# Altium PCB CANHub2Reihig.PcbDoc
Units mil, origin at the board's own origin, x right, y up, seen from the top; angles counter-clockwise.
Board outline 2100 x 915 mil, 2 copper layers (Top Layer, Bottom Layer); 16 components, 4 nets, 66 pads, 0 vias.
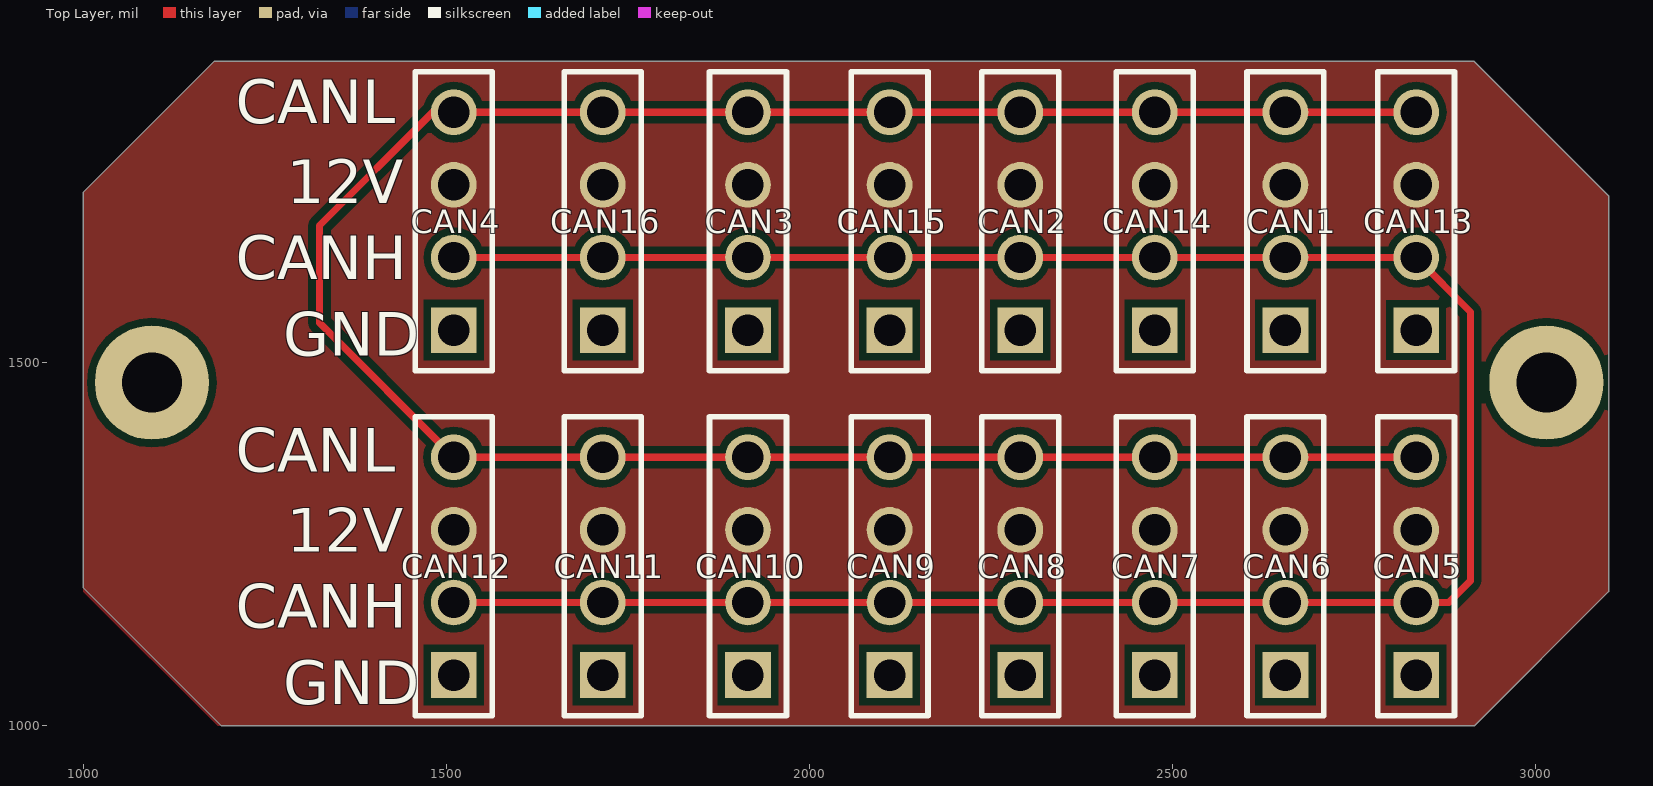
[diagram p0: Top Layer view]
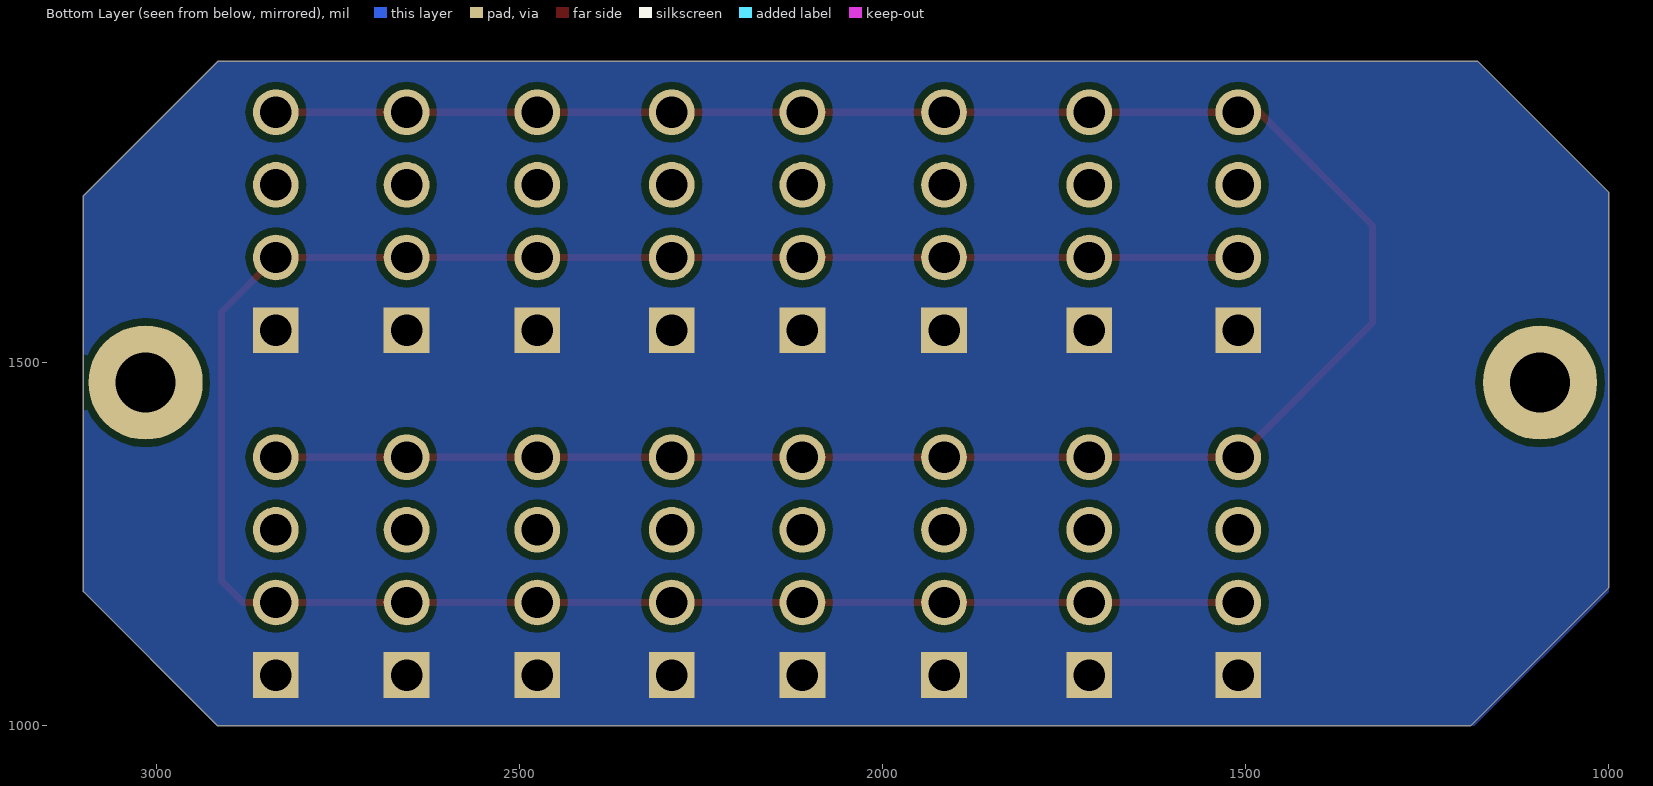
[diagram p1: Bottom Layer view, seen from below]
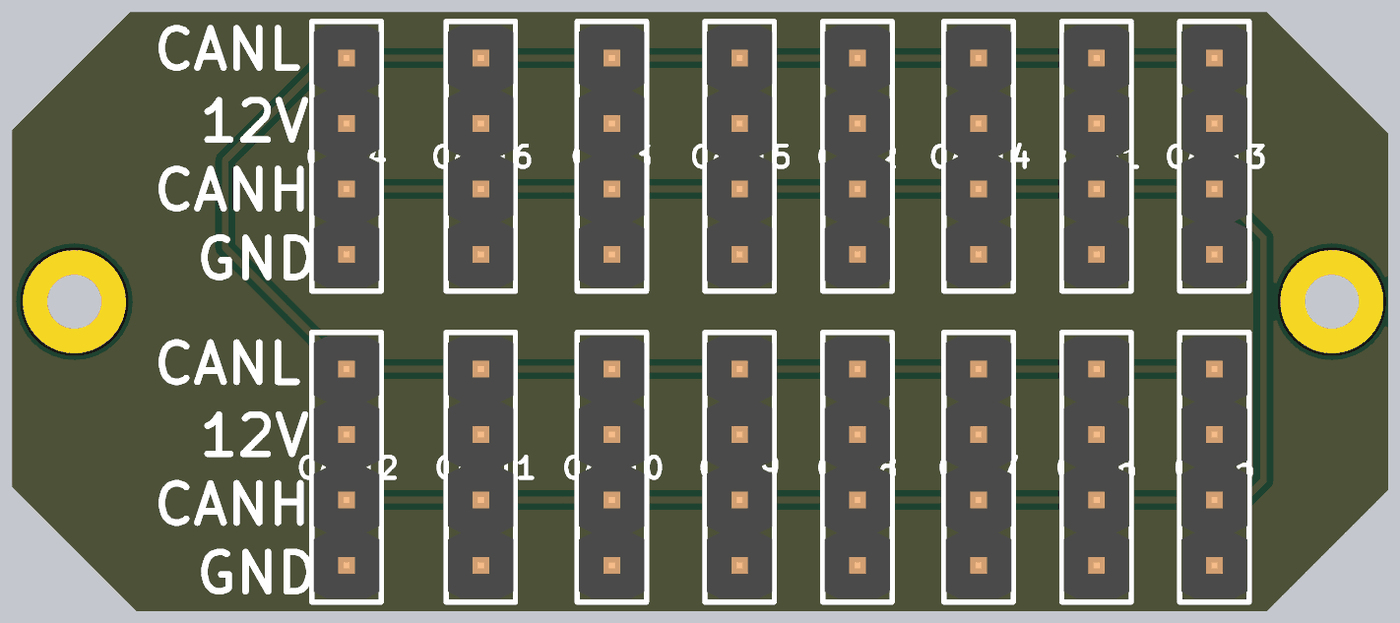
[diagram p2: 3D render of the assembled board from above, using the file's embedded part models]

## Layer stack, top to bottom
Top Solder: solder mask 0.4, Solder Resist, Dk 3.5
Top Layer: signal copper 1.4
Dielectric 1: dielectric 12.6, FR-4, Dk 4.8
Bottom Layer: signal copper 1.4
Bottom Solder: solder mask 0.4, Solder Resist, Dk 3.5

## Board outline
1000,1190 1000,1735 1180,1915 2915,1915 3100,1730 3100,1185 2915,1000 1190,1000

## Design rules (kind name [scope] priority, off if disabled: settings)
Clearance [All] p1: gap=10 ignorepadtopadclearanceinfootprint=FALSE except(0: Arc-Hole Track-Hole SMDPad-Hole THPad-Hole Via-Hole Fill-Hole Poly-Hole Region-Hole Text-Hole)
PolygonConnect PolygonConnect_4 [All vs IsNamedPolygon('12V_L01_P000')] p1: connectstyle=Direct reliefconductorwidth=10 reliefentries=4 polygonreliefangle="90 Angle" airgapwidth=10
PolygonConnect PolygonConnect_3 [All vs IsNamedPolygon('GND_L02_P001')] p2: connectstyle=Direct reliefconductorwidth=10 reliefentries=4 polygonreliefangle="90 Angle" airgapwidth=10
PolygonConnect PolygonConnect_2 [All vs IsNamedPolygon('GND_L02_P001')] p3: connectstyle=Direct reliefconductorwidth=10 reliefentries=4 polygonreliefangle="90 Angle" airgapwidth=10
PolygonConnect PolygonConnect_1 [All vs IsNamedPolygon('12V_L01_P000')] p4: connectstyle=Direct reliefconductorwidth=10 reliefentries=4 polygonreliefangle="90 Angle" airgapwidth=10
PolygonConnect [All] p5: connectstyle=Relief reliefconductorwidth=10 reliefentries=4 polygonreliefangle="90 Angle" airgapwidth=10
RoomDefinition CANHub [InComponentClass('CANHub')] p1: confinementstyle=ConfineIn formatcopy=TRUE lockcomponents=FALSE outline 7045,1065 10075,1065 10075,3045 7045,3045
RoutingVias [All] p1: holewidth=28 width=50 viastyle="Through Hole" minholewidth=28 minwidth=50 maxholewidth=28 maxwidth=50
SolderMaskExpansion [All] p1: expansion=4 istentingtop=FALSE
Width [All] p1: maxlimit=10 minlimit=10 preferedwidth=10
30 further rules are at their usual default settings.

## Components (designator, comment, footprint, x,y, rotation, side; value= is the part's Value field where it differs from the comment)
CAN1 "61300411121" 61300411121 2655,1695 r90 top
CAN2 "61300411121" 61300411121 2290,1695 r90 top
CAN3 "61300411121" 61300411121 1915,1695 r90 top
CAN4 "61300411121" 61300411121 1510,1695 r90 top
CAN5 "61300411121" 61300411121 2835,1220 r90 top
CAN6 "61300411121" 61300411121 2655,1220 r90 top
CAN7 "61300411121" 61300411121 2475,1220 r90 top
CAN8 "61300411121" 61300411121 2290,1220 r90 top
CAN9 "61300411121" 61300411121 2110,1220 r90 top
CAN10 "61300411121" 61300411121 1915,1220 r90 top
CAN11 "61300411121" 61300411121 1715,1220 r90 top
CAN12 "61300411121" 61300411121 1510,1220 r90 top
CAN13 "61300411121" 61300411121 2835,1695 r90 top
CAN14 "61300411121" 61300411121 2475,1695 r90 top
CAN15 "61300411121" 61300411121 2110,1695 r90 top
CAN16 "61300411121" 61300411121 1715,1695 r90 top

## Footprints (in the part's own frame and the unit in brackets; to place one, negate y for a bottom-side part, rotate by r counter-clockwise, add the part's x,y. Pads: shape width x height; smd on the part's side, far side on the other; paste and mask are expansions set on the pad)
61300411121 [mm] "Pin Header, pitch 2.54 mm, THT, Vertical, single row, 4p"
  rect 1.6x1.6 hole 1.1: 1(-3.81,0)
  round 1.6 hole 1.1: 2(-1.27,0) 3(1.27,0) 4(3.81,0)
  silkscreen extent -5.23,-1.35 5.23,1.35, body extent -5.08,-1.27 5.08,1.27, height 8.57

## Part data
CAN1 CAN2 CAN3 CAN4 CAN5 CAN6 CAN7 CAN8 CAN9 CAN10 CAN11 CAN12 CAN13 CAN14 CAN15 CAN16: library part CMP-1502-01064-1, "THT Vertical Pin Header WR-PHD, Pitch 2.54 mm, Single Row, 4 pins", Contact Resistance=20mOhm, Manufacturer="Wurth Elektronik", Operating Temperature=-40to105degC, Rated Current=3A, Withstanding Voltage=500VAC, Working Voltage=250VAC, Datasheet URL=https://katalog.we-online.de/em/datasheet/6130xx11121.pdf, Gender=Male, Manufacturer URL=http://www.we-online.de, Mounting Technology=THT, Orientation=Vertical, Package Reference=61300411121, Packaging=Bag, Part Number=61300411121, Pin Number=4, Pitch=2.54mm, Publisher=WurthElektronik, Row Number=Single

## Free pads (board coordinates)
  round 157.48 hole 82.68: 5(1094.42,1472.85) 5(3014.42,1472.85)

## Nets (pads, with @x,y where several pads share a name; then routed paths per layer and width w, separated by ;. In a path a pad name is that pad's centre, name@x,y a point inside that pad or via, vN(x,y) a via of type N, cw(c..) or ccw(c..) an arc to the next point about the centre after c; other vN are vias at no path point)
12V: CAN1.3 CAN2.3 CAN3.3 CAN4.3 CAN5.3 CAN6.3 CAN7.3 CAN8.3 CAN9.3 CAN10.3 CAN11.3 CAN12.3 CAN13.3 CAN14.3 CAN15.3 CAN16.3
CANH: CAN1.2 CAN2.2 CAN3.2 CAN4.2 CAN5.2 CAN6.2 CAN7.2 CAN8.2 CAN9.2 CAN10.2 CAN11.2 CAN12.2 CAN13.2 CAN14.2 CAN15.2 CAN16.2 | length 3213.5
  Top Layer w10: CAN12.2 CAN11.2 CAN10.2 CAN9.2 CAN8.2 CAN7.2 CAN6.2 2880,1170 2910,1200 2910,1570 CAN13.2 CAN1.2 CAN14.2 CAN2.2 CAN15.2 CAN3.2 CAN16.2 CAN4.2
CANL: CAN1.4 CAN2.4 CAN3.4 CAN4.4 CAN5.4 CAN6.4 CAN7.4 CAN8.4 CAN9.4 CAN10.4 CAN11.4 CAN12.4 CAN13.4 CAN14.4 CAN15.4 CAN16.4 | length 3307.1
  Top Layer w10: CAN4.4@1501.69,1836.69 CAN4.4 ; CAN5.4 CAN6.4 CAN7.4 CAN8.4 CAN9.4 CAN10.4 CAN11.4 CAN12.4 1325,1555 1325,1689.14 1480.86,1845 CAN4.4 ; CAN13.4 CAN1.4 CAN14.4 CAN2.4 CAN15.4 CAN3.4 CAN16.4 CAN4.4
GND: CAN1.1 CAN2.1 CAN3.1 CAN4.1 CAN5.1 CAN6.1 CAN7.1 CAN8.1 CAN9.1 CAN10.1 CAN11.1 CAN12.1 CAN13.1 CAN14.1 CAN15.1 CAN16.1

## Polygon pours and split planes (outlines as drawn)
12V on Top Layer "12V_L01_P000" (solid, pour order 0): 1000,1735 1180,1915 2915,1915 3100,1730 3100,1185 2915,1000 1185,1000 1000,1185
GND on Bottom Layer "GND_L02_P001" (solid, pour order 1): 1000,1735 1180,1915 2915,1915 3100,1730 3100,1185 2915,1000 1185,1000 1000,1185

## Silkscreen, mask and mechanical layers (free items; w line width, h text height)
Top Overlay:
  text "CANL" at 1210,1830 h60
  text "12V" at 1280,1720 h60
  text "CANH" at 1210,1615 h60
  text "GND" at 1275,1510 h60
  text "CANL" at 1210,1350 h60
  text "12V" at 1280,1240 h60
  text "CANH" at 1210,1135 h60
  text "GND" at 1275,1030 h60
Board Outline:
  the board outline again, w10